# EAGLE board ife19_TS_BMS_v2_Eagle-Wei-Wei (EAGLE 9.2.2)

Size 209.53 x 573.96 mm. Coordinates in mm from the lower left corner, seen from the top.
Outline: 49.53,473.96 209.53,473.96 209.53,573.96 49.53,573.96 49.53,473.96
Copper layers (1*16): Top 0.035mm / dielectric 1.5mm / Bottom 0.035mm
Design rules "default": minimum track width 6mil, minimum drill 0.35mm, track to track 6mil, track to pad 6mil, pad to pad 6mil, via to via 6mil, smd to smd 6mil, copper to edge 40mil, drill to drill 6mil, minimum pad ring 10mil, minimum via ring 8mil, stop-mask expansion 4mil, vias tented up to drill 0mil, thermal gap 10mil

## Footprints (pad centres in the part's own frame; a part is rotated, then mirrored left to right if it is on the bottom)
TQFP80 = smd 1.3 x 0.35: 1 -6.595,4.75; 2 -6.595,4.25; 3 -6.595,3.75; 4 -6.595,3.25; 5 -6.595,2.75; 6 -6.595,2.25; 7 -6.595,1.75; 8 -6.595,1.25; 9 -6.595,0.75; 10 -6.595,0.25; 11 -6.595,-0.25; 12 -6.595,-0.75; 13 -6.595,-1.25; 14 -6.595,-1.75; 15 -6.595,-2.25; 16 -6.595,-2.75; 17 -6.595,-3.25; 18 -6.595,-3.75; 19 -6.595,-4.25; 20 -6.595,-4.75; 41 6.595,-4.75; 42 6.595,-4.25; 43 6.595,-3.75; 44 6.595,-3.25; 45 6.595,-2.75; 46 6.595,-2.25; 47 6.595,-1.75; 48 6.595,-1.25; 49 6.595,-0.75; 50 6.595,-0.25; 51 6.595,0.25; 52 6.595,0.75; 53 6.595,1.25; 54 6.595,1.75; 55 6.595,2.25; 56 6.595,2.75; 57 6.595,3.25; 58 6.595,3.75; 59 6.595,4.25; 60 6.595,4.75 | smd 0.35 x 1.3: 21 -4.75,-6.595; 22 -4.25,-6.595; 23 -3.75,-6.595; 24 -3.25,-6.595; 25 -2.75,-6.595; 26 -2.25,-6.595; 27 -1.75,-6.595; 28 -1.25,-6.595; 29 -0.75,-6.595; 30 -0.25,-6.595; 31 0.25,-6.595; 32 0.75,-6.595; 33 1.25,-6.595; 34 1.75,-6.595; 35 2.25,-6.595; 36 2.75,-6.595; 37 3.25,-6.595; 38 3.75,-6.595; 39 4.25,-6.595; 40 4.75,-6.595; 61 4.75,6.595; 62 4.25,6.595; 63 3.75,6.595; 64 3.25,6.595; 65 2.75,6.595; 66 2.25,6.595; 67 1.75,6.595; 68 1.25,6.595; 69 0.75,6.595; 70 0.25,6.595; 71 -0.25,6.595; 72 -0.75,6.595; 73 -1.25,6.595; 74 -1.75,6.595; 75 -2.25,6.595; 76 -2.75,6.595; 77 -3.25,6.595; 78 -3.75,6.595; 79 -4.25,6.595; 80 -4.75,6.595
C0603K = smd 1.05 x 1.08: 1 -0.875,0; 2 0.875,0
C0603 = smd 1.1 x 1: 1 -0.85,0; 2 0.85,0
C0805 = smd 1.3 x 1.5: 1 -0.95,0; 2 0.95,0
SOD-123 = smd 1.2 x 0.7: A 1.85,0; C -1.85,0
DO214AC = smd 1.8 x 1.7: A 2.05,0; C -2.05,0
SOT23 = smd 1 x 1.4: 1 -0.95,-1.1; 2 0.95,-1.1; 3 0,1.1
CHIPLED_0603 = smd 0.8 x 0.8: A 0,-0.75; C 0,0.75
R0603 = smd 1 x 1.1: 1 -0.85,0; 2 0.85,0
R0805 = smd 1.3 x 1.5: 1 -0.95,0; 2 0.95,0
6PT = drill 1.016: 1 8.9,44.36; 2 11.44,44.36 | drill 5 pad 10: CELLH+ 10.15,12.25; CELLH- 10.15,57.25 | smd 20.32 x 12.7 bottom: CELLP+ 10.135,12.243; CELLP- 10.16,57.252
SRF5432 = smd 1.35 x 2.5: P$1 -1.885,-1.679; P$2 1.955,-1.679; P$3 1.955,1.731; P$4 -1.885,1.731
DPDT_2.54 = drill 0.6: $P1 -6.35,2.54; $P3 -1.27,2.54; $P4 1.27,2.54; $P5 3.81,2.54; $P8 3.81,-2.54; $P9 1.27,-2.54; $P10 -1.27,-2.54; $P12 -6.35,-2.54
LFPAK56D = smd 0.7 x 1.2: B1 -0.635,-3.175; B2 1.905,-3.175; E1 -1.905,-3.175; E2 0.635,-3.175 | smd 2 x 6: C1 -1.27,0.9; C2 1.27,0.9
6POS-3MM = drill 1: P$1 7.5,0; P$2 4.5,0; P$3 1.5,0; P$4 -1.5,0; P$5 -4.5,0; P$6 -7.5,0 | hole 1.27: -10.5,-2; 10.5,-2
DR331 = smd 2.2 x 1.2: P$1 -3.7,1.25; P$2 -3.7,-1.25; P$3 3.7,-1.25; P$4 3.7,1.25
0603 = smd 1.05 x 1.08: 1 -0.875,0; 2 0.875,0
TO252-TKH-45 = smd 2 x 3: 1 -2.55,-12.5; 2 2.55,-12.5 | smd 8 x 8.2: 3 0,-4.1
TO252 = smd 1.2 x 2.2: 1 -2.279,-7.409; 3 2.321,-7.409 | smd 6.35 x 7.62: 2 0.021,-0.009

## Placement (x,y rotation side)
C  BQ76PL455A  [TQFP80]  27.94,481.58 0 top
C1  390p  [C0603K]  16.51,454.91 0 top
C2  390p  [C0603K]  16.51,451.1 0 top
C3  4.7u  [C0603K]  16.51,447.29 0 top
C4  4.7u  [C0603K]  16.51,443.48 0 top
C5  0.1u  [C0603K]  16.51,439.67 0 top
C6  1.8u  [C0603K]  16.51,435.86 0 top
C7  0.1u  [C0603K]  16.51,432.05 0 top
C8  1.8u  [C0603K]  16.51,428.24 0 top
C9  4.7u  [C0603K]  16.51,423.16 0 top
C10  0.1u  [C0603K]  16.51,419.35 0 top
C11  4.7u  [C0603K]  16.51,415.54 0 top
C12  0.1u  [C0603K]  16.51,411.73 0 top
C13  0.1u  [C0603K]  16.51,406.65 0 top
C14  0.1u  [C0603K]  16.51,402.84 0 top
C15  4.7u  [C0603K]  16.51,397.76 0 top
C16  0.1u  [C0603K]  16.51,393.95 0 top
C17  4.7u  [C0603K]  16.51,390.14 0 top
C18  0.1  [C0603K]  16.51,386.33 0 top
C19  0.1u  [C0603K]  16.51,381.25 0 top
C20  4.7u  [C0603K]  16.51,377.44 0 top
C21  4.7u  [C0603K]  16.51,373.63 0 top
C22  0.1u  [C0603K]  16.51,369.82 0 top
C23  22n  [C0603]  16.51,357.12 0 top
C24  22n  [C0603]  16.51,353.31 0 top
C25  1u  [C0603K]  21.59,129.79 0 top
C26  1u  [C0603K]  43.18,134.87 0 top
C27  1u  [C0603K]  25.4,129.79 0 top
C28  1u  [C0603K]  0,-40.39 0 top  (outside the outline)
C29  1u  [C0603K]  3.81,-40.39 0 top  (outside the outline)
C30  1nF  [C0805]  -5.08,-88.65 0 top  (outside the outline)
C31  1nF  [C0805]  0,-88.65 0 top  (outside the outline)
C32  1nF  [C0805]  5.08,-88.65 0 top  (outside the outline)
C33  1nF  [C0805]  10.16,-88.65 0 top  (outside the outline)
C34  1nF  [C0805]  15.24,-88.65 0 top  (outside the outline)
C35  1nF  [C0805]  20.32,-88.65 0 top  (outside the outline)
C36  1nF  [C0805]  25.4,-88.65 0 top  (outside the outline)
C37  1nF  [C0805]  30.48,-88.65 0 top  (outside the outline)
C38  1nF  [C0805]  -5.08,-163.58 0 top  (outside the outline)
C39  1nF  [C0805]  0,-163.58 0 top  (outside the outline)
C40  1nF  [C0805]  -5.08,-169.93 0 top  (outside the outline)
C41  1nF  [C0805]  0,-169.93 0 top  (outside the outline)
D1  [SOD-123]  25.4,124.71 0 top
D2  [SOD-123]  48.26,136.14 0 top
D3  [SOD-123]  17.78,119.63 0 top
D4  [SOD-123]  2.54,-45.47 0 top  (outside the outline)
D5  [DO214AC]  19.05,123.44 0 top
D6  [SOD-123]  -3.81,-50.55 0 top  (outside the outline)
D7  [SOD-123]  2.54,-50.55 0 top  (outside the outline)
D8  [SOD-123]  -3.81,-54.36 0 top  (outside the outline)
D9  [SOD-123]  24.13,119.63 0 top
D10  [DO214AC]  -3.81,-46.74 0 top  (outside the outline)
D11  [SOD-123]  17.78,115.82 0 top
D12  PESD1CAN  [SOT23]  -5.08,-59.44 0 top  (outside the outline)
D13  PESD1CAN  [SOT23]  6.35,-59.44 0 top  (outside the outline)
D14  PESD1CAN  [SOT23]  -5.08,-106.43 0 top  (outside the outline)
D15  PESD1CAN  [SOT23]  17.78,-59.44 0 top  (outside the outline)
D16  PESD1CAN  [SOT23]  -5.08,-114.05 0 top  (outside the outline)
D17  PESD1CAN  [SOT23]  -5.08,-67.06 0 top  (outside the outline)
D18  PESD1CAN  [SOT23]  -5.08,-135.64 0 top  (outside the outline)
D19  PESD1CAN  [SOT23]  -5.08,-143.26 0 top  (outside the outline)
ENABLED_LED2  [CHIPLED_0603]  36.83,141.22 0 top
R1  1  [R0603]  16.51,471.42 0 top
R2  1  [R0603]  16.51,467.61 0 top
R3  1  [R0603]  16.51,463.8 0 top
R4  1  [R0603]  16.51,459.99 0 top
R5  0.39  [R0603]  16.51,366.01 0 top
R6  0.39  [R0603]  16.51,362.2 0 top
R7  100  [R0603]  21.59,112.01 0 top
R8  100  [R0603]  16.51,106.93 0 top
R9  100  [R0603]  21.59,106.93 0 top
R10  100  [R0603]  16.51,112.01 0 top
R11  100  [R0603]  21.59,96.77 0 top
R12  100  [R0603]  16.51,101.85 0 top
R13  100  [R0603]  21.59,101.85 0 top
R14  100  [R0603]  16.51,96.77 0 top
R15  100  [R0603]  16.51,91.69 0 top
R16  100  [R0603]  21.59,91.69 0 top
R17  100  [R0603]  16.51,86.61 0 top
R18  100  [R0603]  21.59,86.61 0 top
R19  100  [R0603]  16.51,81.53 0 top
R20  100  [R0603]  21.59,81.53 0 top
R21  100  [R0603]  16.51,76.45 0 top
R22  100  [R0603]  21.59,76.45 0 top
R23  100  [R0603]  16.51,71.37 0 top
R24  100  [R0603]  21.59,71.37 0 top
R25  100  [R0603]  16.51,66.29 0 top
R26  100  [R0603]  21.59,66.29 0 top
R27  100  [R0603]  16.51,61.21 0 top
R28  100  [R0603]  21.59,61.21 0 top
R29  100  [R0603]  16.51,56.13 0 top
R30  100  [R0603]  21.59,56.13 0 top
R31  100  [R0603]  16.51,51.05 0 top
R32  100  [R0603]  21.59,51.05 0 top
R33  100  [R0603]  16.51,45.97 0 top
R34  100  [R0603]  21.59,45.97 0 top
R35  100  [R0603]  16.51,40.89 0 top
R36  100  [R0603]  21.59,40.89 0 top
R37  100  [R0603]  16.51,35.81 0 top
R38  1k  [R0603]  16.51,30.73 0 top
R39  100  [R0603]  16.51,129.79 0 top
R40  1k  [R0603]  16.51,26.92 0 top
R41  1k  [R0603]  16.51,23.11 0 top
R42  1k  [R0603]  16.51,19.3 0 top
R43  1k  [R0603]  16.51,15.49 0 top
R44  1k  [R0603]  16.51,11.68 0 top
R45  1k  [R0603]  16.51,7.87 0 top
R46  1k  [R0603]  16.51,4.06 0 top
R47  2k  [R0603]  -5.08,-35.31 0 top  (outside the outline)
R48  100  [R0603]  -5.08,-40.39 0 top  (outside the outline)
R49  100  [R0603]  66.04,152.65 0 top
R50  1k  [R0603]  16.51,-7.37 0 top  (outside the outline)
R51  1k  [R0603]  16.51,-11.18 0 top  (outside the outline)
R52  1k  [R0603]  16.51,-14.99 0 top  (outside the outline)
R53  330  [R0603]  71.12,152.65 0 top
R54  1k  [R0603]  16.51,-18.8 0 top  (outside the outline)
R55  1k  [R0603]  16.51,-22.61 0 top  (outside the outline)
R56  2k  [R0603]  16.51,134.87 0 top
R57  1k  [R0603]  16.51,-26.42 0 top  (outside the outline)
R58  1k  [R0603]  16.51,-30.23 0 top  (outside the outline)
R59  10  [R0805]  19.05,-74.68 0 top  (outside the outline)
R60  10  [R0805]  25.4,-74.68 0 top  (outside the outline)
R61  10  [R0805]  -5.08,-82.3 0 top  (outside the outline)
R62  10  [R0805]  1.27,-82.3 0 top  (outside the outline)
R63  10  [R0805]  7.62,-82.3 0 top  (outside the outline)
R64  10  [R0805]  13.97,-82.3 0 top  (outside the outline)
R65  10  [R0805]  20.32,-82.3 0 top  (outside the outline)
R66  10  [R0805]  26.67,-82.3 0 top  (outside the outline)
R67  10  [R0805]  6.35,-114.05 0 top  (outside the outline)
R68  10  [R0805]  -5.08,-121.67 0 top  (outside the outline)
R69  10  [R0805]  1.27,-121.67 0 top  (outside the outline)
R70  10  [R0805]  -5.08,-128.02 0 top  (outside the outline)
R71  10  [R0805]  6.35,-143.26 0 top  (outside the outline)
R72  10  [R0805]  -5.08,-150.88 0 top  (outside the outline)
R73  10  [R0805]  1.27,-150.88 0 top  (outside the outline)
R74  10  [R0805]  -5.08,-157.23 0 top  (outside the outline)
T  BQ76PL455A  [TQFP80]  27.94,496.82 0 top
TR50  100K  [R0603]  49.53,152.65 0 top
U$1  LI6PT  [6PT]  -6.35,-31.5 0 top
U$2  SRF5432  [SRF5432]  -3.81,-95 0 top  (outside the outline)
U$3  EC2  [DPDT_2.54]  29.21,509.52 0 top
U$4  PHPT610030NK  [LFPAK56D]  17.78,479.04 0 top
U$5  MICROFIT3.0-3P  [6POS-3MM]  15.24,-68.33 0 top  (outside the outline)
U$6  SRF5432  [SRF5432]  2.54,-95 0 top  (outside the outline)
U$7  MICROFIT3.0-3P  [6POS-3MM]  5.08,-75.95 0 top  (outside the outline)
U$8  SRF5432  [SRF5432]  8.89,-95 0 top  (outside the outline)
U$9  SRF5432  [SRF5432]  15.24,-95 0 top  (outside the outline)
U$10  DR331  [DR331]  24.13,-93.73 0 top  (outside the outline)
U$12  DR331  [DR331]  -2.54,-100.08 0 top  (outside the outline)
U$14  DR331  [DR331]  7.62,-100.08 0 top  (outside the outline)
U$16  DR331  [DR331]  17.78,-100.08 0 top  (outside the outline)
U$22  SF-0603FP  [0603]  30.48,134.87 0 top
U$23  TKH45  [TO252-TKH-45]  29.21,152.65 0 top
U$25  IPD60N10S4L-12  [TO252]  76.2,216.15 0 top

## Library data of the parts
C T = bq76pl455a
C1-C41 = rcl; SPICEPREFIX: C
D1-D4 D6-D9 D11 = adafruit
D5 D10 D12-D19 = diode
ENABLED_LED2 = led
R1-R74 TR50 = rcl; SPICEPREFIX: R
U$1 = IFE_Energus
U$2 U$6 U$8-U$10 U$12 U$14 U$16 = Chokes
U$3 = KEMET
U$4 U$25 = IFE_Transistors
U$5 U$7 = Molex
U$22 = IFE_Fuses
U$23 = IFE_Resistors

## Nets
C_CELL_EQ1: C.28
C_CELL_EQ2: C.26
C_CELL_EQ3: C.24
C_CELL_EQ4: C.22
C_CELL_EQ5: C.20
C_CELL_EQ6: C.18
C_CELL_EQ7: C.16
C_CELL_EQ8: C.14
C_CELL_EQ9: C.12
C_CELL_EQ10: C.10
C_CELL_EQ11: C.8
C_CELL_EQ12: C.6
C_CELL_EQ13: C.4
C_CELL_EQ14: C.2
C_CELL_EQ15: C.80
C_CELL_EQ16: C.78 R56.1
C_CELL_TOP: C25.1 C.76 D1.C D3.A R39.2
C_CELL_VSENSE0: C27.1 C.29 D9.C D11.A
C_CELL_VSENSE1: C.27 R23.1
C_CELL_VSENSE2: C.25 R24.1
C_CELL_VSENSE3: C.23 R25.1
C_CELL_VSENSE4: C.21 R26.1
C_CELL_VSENSE5: C.19 R27.1
C_CELL_VSENSE6: C.17 R28.1
C_CELL_VSENSE7: C.15 R29.1
C_CELL_VSENSE8: C.13 R30.1
C_CELL_VSENSE9: C.11 R31.1
C_CELL_VSENSE10: C.9 R32.1
C_CELL_VSENSE11: C.7 R33.1
C_CELL_VSENSE12: C.5 R34.1
C_CELL_VSENSE13: C.3 R35.1
C_CELL_VSENSE14: C.1 R36.1
C_CELL_VSENSE15: C.79 R37.1
C_CELL_VSENSE16: C26.1 C.77 D1.A D2.C D3.C D4.A D6.C R49.2
CELL15: R21.1 R37.2 R58.2 TR50.1 U$1.1 U$1.CELLH- U$1.CELLP- U$23.3 U$25.3
CELL16: R47.2 U$1.CELLH+ U$1.CELLP+ U$22.1
CELL_F16: D5.C D10.C R39.1 R48.1 R49.1 R53.1 U$22.2 U$23.1
COMMH+: D15.1 R64.2 T.55
COMMH+ISO: C35.2 U$7.P$2
COMMH-: D15.2 R63.2 T.54
COMMH-ISO: C34.2 U$7.P$1
COMML+: C.52 C.56 D12.2 D14.2 D18.2 R60.1 R68.1 R72.1 T.52
COMML+ISO: C31.2 U$5.P$5
COMML-: C.53 C.57 D12.1 D14.1 D18.1 R59.1 R67.1 R71.1 T.53
COMML-ISO: C30.2 U$5.P$6
FAULTH+: D17.1 R66.2 T.57
FAULTH+ISO: C37.2 U$7.P$4
FAULTH-: D17.2 R65.2 T.56
FAULTH-ISO: C36.2 U$7.P$3
FAULTL+: C.50 C.54 D13.2 D16.2 D19.2 R62.1 R70.1 R74.1 T.50
FAULTL+ISO: C33.2 U$5.P$3
FAULTL-: C.51 C.55 D13.1 D16.1 D19.1 R61.1 R69.1 R73.1 T.51
FAULTL-ISO: C32.2 U$5.P$4
GATE16: R56.2 TR50.2 U$25.1
GND: C1.2 C2.2 C3.2 C4.2 C5.2 C6.2 C7.2 C8.2 C9.2 C10.2 C11.2 C12.2 C13.2 C14.2 C15.2 C16.2 C17.2 C18.2 C19.2 C20.2 C21.2 C22.2 C25.2 C26.2 C27.2 C28.2 C29.2 C.30 C.35 C.37 C.48 C.69 C.72 C.74 D5.A D7.A D8.C D9.A D10.A D11.C D12.3 D13.3 D14.3 D15.3 D16.3 D17.3 D18.3 D19.3 R38.1 T.30 T.35 T.37 T.48 T.69 T.72 T.74
N$1: C23.1 C.32
N$2: C23.2 C.33
N$3: C1.1 C.68 C.73
N$4: C2.1 T.68 T.73
N$5: C24.1 T.32
N$6: C24.2 T.33
N$7: R3.2 U$3.$P8
N$8: R4.2 U$3.$P5
N$9: C30.1 U$2.P$3
N$10: C31.1 U$2.P$2
N$11: R20.1 R36.2 R46.2 R58.1
N$12: R19.1 R35.2 R46.1 R57.2
N$13: R18.1 R34.2 R45.2 R57.1
N$14: R17.1 R33.2 R45.1 R55.2
N$15: R16.1 R32.2 R44.2 R55.1
N$16: R15.1 R31.2 R44.1 R54.2
N$17: R14.1 R30.2 R43.2 R54.1
N$18: R13.1 R29.2 R43.1 R52.2
N$19: R12.1 R28.2 R42.2 R52.1
N$20: C20.1 R5.1
N$21: C21.1 R6.1
N$22: R11.1 R27.2 R42.1 R51.2
N$23: R10.1 R26.2 R41.2 R51.1
N$24: R9.1 R25.2 R41.1 R50.2
N$25: R8.1 R24.2 R40.2 R50.1
N$26: R7.1 R23.2 R38.2 R40.1
N$27: C32.1 U$6.P$3
N$28: C33.1 U$6.P$2
N$29: ENABLED_LED2.A R53.2
N$30: C34.1 U$9.P$2
N$31: C35.1 U$9.P$3
N$32: C36.1 U$8.P$2
N$33: C37.1 U$8.P$3
N$34: U$9.P$4 U$14.P$2
N$35: U$9.P$1 U$14.P$1
N$36: U$8.P$4 U$16.P$2
N$37: U$8.P$1 U$16.P$1
N$38: U$2.P$1 U$10.P$3
N$39: U$2.P$4 U$10.P$4
N$40: U$6.P$1 U$12.P$3
N$41: ENABLED_LED2.C U$23.2 U$25.2
N$42: U$6.P$4 U$12.P$4
N$43: R62.2 U$12.P$2
N$44: R66.1 U$16.P$3
N$45: R61.2 U$12.P$1
N$46: R60.2 U$10.P$2
N$47: R59.2 U$10.P$1
N$48: R65.1 U$16.P$4
N$49: R64.1 U$14.P$3
N$50: R63.1 U$14.P$4
N$51: C41.2 R67.2
N$52: C40.2 R68.2
N$53: C39.2 R69.2
N$54: C38.2 R70.2
N$55: C38.1 R71.2
N$56: C39.1 R72.2
N$57: C40.1 R73.2
N$58: C41.1 R74.2
NPNB_C: C.71 U$4.B1
NPNB_T: T.71 U$4.B2
ON+: U$3.$P12 U$5.P$1 U$7.P$6
ON-: U$3.$P1 U$5.P$2 U$7.P$5
T_CELL_EQ1: T.28
T_CELL_EQ2: T.26
T_CELL_EQ3: T.24
T_CELL_EQ4: T.22
T_CELL_EQ5: T.20
T_CELL_EQ6: T.18
T_CELL_EQ7: T.16
T_CELL_EQ8: T.14
T_CELL_EQ9: T.12
T_CELL_EQ10: T.10
T_CELL_EQ11: T.8
T_CELL_EQ12: T.6
T_CELL_EQ13: T.4
T_CELL_EQ14: T.2
T_CELL_EQ15: T.80
T_CELL_EQ16: T.78
T_CELL_TOP: C28.1 D4.C D6.A R48.2 T.76
T_CELL_VSENSE0: C29.1 D7.C D8.A T.29
T_CELL_VSENSE1: R7.2 T.27
T_CELL_VSENSE2: R8.2 T.25
T_CELL_VSENSE3: R9.2 T.23
T_CELL_VSENSE4: R10.2 T.21
T_CELL_VSENSE5: R11.2 T.19
T_CELL_VSENSE6: R12.2 T.17
T_CELL_VSENSE7: R13.2 T.15
T_CELL_VSENSE8: R14.2 T.13
T_CELL_VSENSE9: R15.2 T.11
T_CELL_VSENSE10: R16.2 T.9
T_CELL_VSENSE11: R17.2 T.7
T_CELL_VSENSE12: R18.2 T.5
T_CELL_VSENSE13: R19.2 T.3
T_CELL_VSENSE14: R20.2 T.1
T_CELL_VSENSE15: R21.2 T.79
T_CELL_VSENSE16: R22.2 R47.1 T.77 U$1.2
TOP: U$4.C1 U$4.C2
V5VAO_C: C3.1 C.58
V5VAO_T: C4.1 T.58
VDIG_C: C15.1 C16.1 C.34 R1.1
VDIG_T: C17.1 C18.1 R2.1 T.34
VIO_C: C13.1 C.41 R3.1
VIO_T: C14.1 R4.1 T.41
VM_C: C9.1 C10.1 C.31
VM_T: C11.1 C12.1 T.31
VP_C: C19.1 C.70 R1.2 R5.2 U$3.$P9 U$4.E1
VP_T: C22.1 R2.2 R6.2 T.70 U$3.$P4 U$4.E2
VREF_C: C5.1 C6.1 C.67
VREF_T: C7.1 C8.1 T.67

## Tracks (layer width: path | path; a pad name or v marks a point on that pad's centre or on a via)
C_CELL_EQ16  (1 unrouted)
C_CELL_TOP  (4 unrouted)
C_CELL_VSENSE0  (3 unrouted)
C_CELL_VSENSE1  (1 unrouted)
C_CELL_VSENSE2  (1 unrouted)
C_CELL_VSENSE3  (1 unrouted)
C_CELL_VSENSE4  (1 unrouted)
C_CELL_VSENSE5  (1 unrouted)
C_CELL_VSENSE6  (1 unrouted)
C_CELL_VSENSE7  (1 unrouted)
C_CELL_VSENSE8  (1 unrouted)
C_CELL_VSENSE9  (1 unrouted)
C_CELL_VSENSE10  (1 unrouted)
C_CELL_VSENSE11  (1 unrouted)
C_CELL_VSENSE12  (1 unrouted)
C_CELL_VSENSE13  (1 unrouted)
C_CELL_VSENSE14  (1 unrouted)
C_CELL_VSENSE15  (1 unrouted)
C_CELL_VSENSE16  (7 unrouted)
CELL15  (8 unrouted)
CELL16  (3 unrouted)
CELL_F16  (7 unrouted)
COMMH+  (2 unrouted)
COMMH+ISO  (1 unrouted)
COMMH-  (2 unrouted)
COMMH-ISO  (1 unrouted)
COMML+  (8 unrouted)
COMML+ISO  (1 unrouted)
COMML-  (8 unrouted)
COMML-ISO  (1 unrouted)
FAULTH+  (2 unrouted)
FAULTH+ISO  (1 unrouted)
FAULTH-  (2 unrouted)
FAULTH-ISO  (1 unrouted)
FAULTL+  (8 unrouted)
FAULTL+ISO  (1 unrouted)
FAULTL-  (8 unrouted)
FAULTL-ISO  (1 unrouted)
GATE16  (2 unrouted)
GND  (55 unrouted)
N$1  (1 unrouted)
N$2  (1 unrouted)
N$3  (2 unrouted)
N$4  (2 unrouted)
N$5  (1 unrouted)
N$6  (1 unrouted)
N$7  (1 unrouted)
N$8  (1 unrouted)
N$9  (1 unrouted)
N$10  (1 unrouted)
N$11  (3 unrouted)
N$12  (3 unrouted)
N$13  (3 unrouted)
N$14  (3 unrouted)
N$15  (3 unrouted)
N$16  (3 unrouted)
N$17  (3 unrouted)
N$18  (3 unrouted)
N$19  (3 unrouted)
N$20  (1 unrouted)
N$21  (1 unrouted)
N$22  (3 unrouted)
N$23  (3 unrouted)
N$24  (3 unrouted)
N$25  (3 unrouted)
N$26  (3 unrouted)
N$27  (1 unrouted)
N$28  (1 unrouted)
N$29  (1 unrouted)
N$30  (1 unrouted)
N$31  (1 unrouted)
N$32  (1 unrouted)
N$33  (1 unrouted)
N$34  (1 unrouted)
N$35  (1 unrouted)
N$36  (1 unrouted)
N$37  (1 unrouted)
N$38  (1 unrouted)
N$39  (1 unrouted)
N$40  (1 unrouted)
N$41  (2 unrouted)
N$42  (1 unrouted)
N$43  (1 unrouted)
N$44  (1 unrouted)
N$45  (1 unrouted)
N$46  (1 unrouted)
N$47  (1 unrouted)
N$48  (1 unrouted)
N$49  (1 unrouted)
N$50  (1 unrouted)
N$51  (1 unrouted)
N$52  (1 unrouted)
N$53  (1 unrouted)
N$54  (1 unrouted)
N$55  (1 unrouted)
N$56  (1 unrouted)
N$57  (1 unrouted)
N$58  (1 unrouted)
NPNB_C  (1 unrouted)
NPNB_T  (1 unrouted)
ON+  (2 unrouted)
ON-  (2 unrouted)
T_CELL_TOP  (4 unrouted)
T_CELL_VSENSE0  (3 unrouted)
T_CELL_VSENSE1  (1 unrouted)
T_CELL_VSENSE2  (1 unrouted)
T_CELL_VSENSE3  (1 unrouted)
T_CELL_VSENSE4  (1 unrouted)
T_CELL_VSENSE5  (1 unrouted)
T_CELL_VSENSE6  (1 unrouted)
T_CELL_VSENSE7  (1 unrouted)
T_CELL_VSENSE8  (1 unrouted)
T_CELL_VSENSE9  (1 unrouted)
T_CELL_VSENSE10  (1 unrouted)
T_CELL_VSENSE11  (1 unrouted)
T_CELL_VSENSE12  (1 unrouted)
T_CELL_VSENSE13  (1 unrouted)
T_CELL_VSENSE14  (1 unrouted)
T_CELL_VSENSE15  (1 unrouted)
T_CELL_VSENSE16  (3 unrouted)
TOP  (1 unrouted)
V5VAO_C  (1 unrouted)
V5VAO_T  (1 unrouted)
VDIG_C  (3 unrouted)
VDIG_T  (3 unrouted)
VIO_C  (2 unrouted)
VIO_T  (2 unrouted)
VM_C  (2 unrouted)
VM_T  (2 unrouted)
VP_C  (5 unrouted)
VP_T  (5 unrouted)
VREF_C  (2 unrouted)
VREF_T  (2 unrouted)